# EAGLE board PCB (EAGLE 9.7.0)
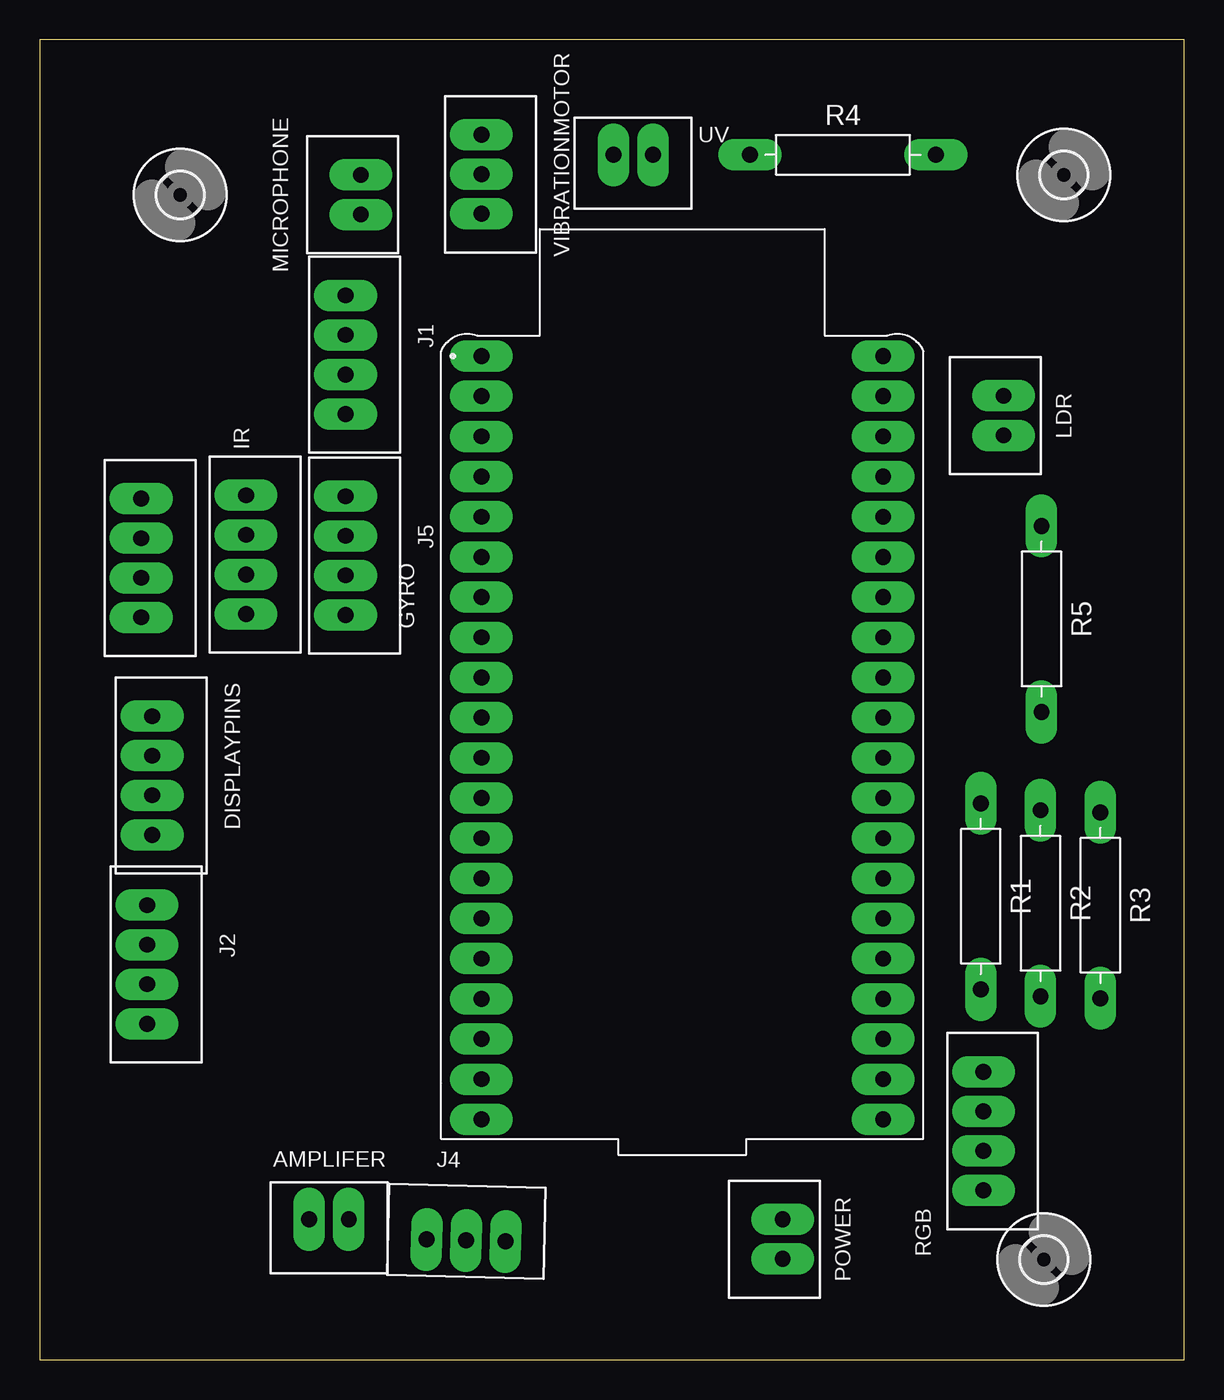
[diagram p0: board, top side]
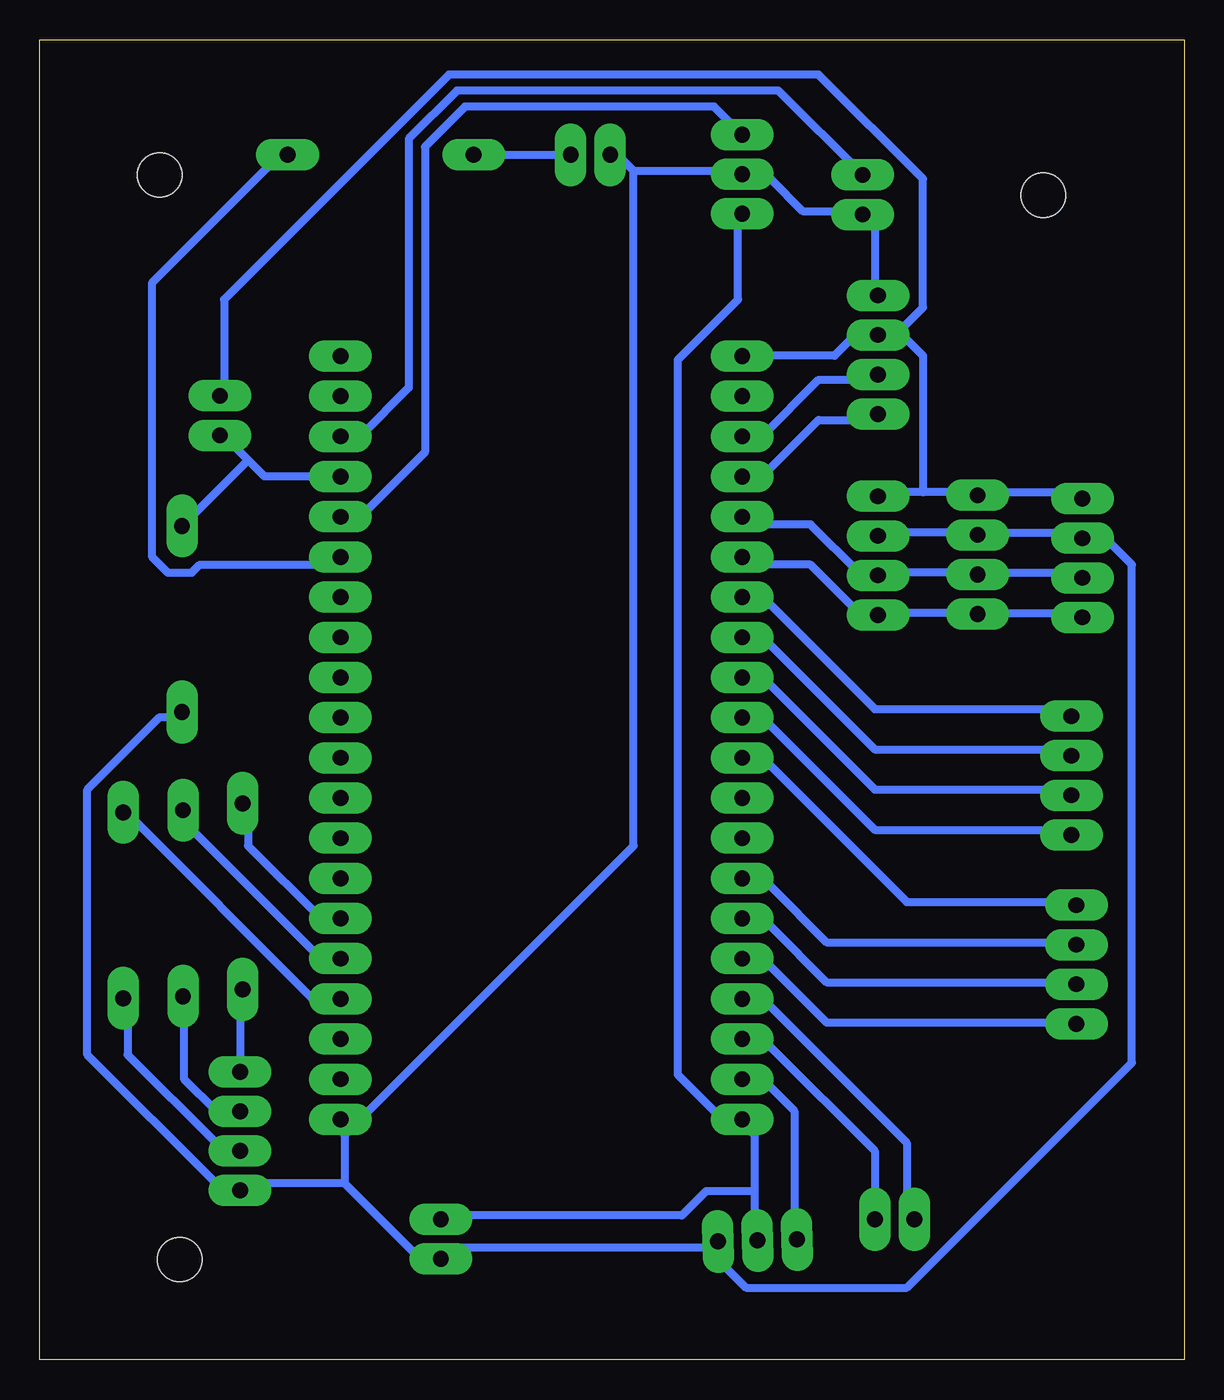
[diagram p1: board, bottom side, seen from below]

Size 72.37 x 83.49 mm. Coordinates in mm from the lower left corner, seen from the top.
Outline: 0,0 72.37,0 72.37,83.49 0,83.49 0,0
Copper layers (1*16): Top / Bottom
Stack-up Default Layer Stack: Top SilkScreen Epoxy Ink / Top SolderMask SR:Green 0.0254mm Dk 4.3 / Top Surface Finish Lead-Free 0.02mm / Top CuFoil:007 0.035mm / Dielectric-1 User Defined 1.5mm / Bottom CuFoil:007 0.035mm / Bottom Surface Finish Lead-Free 0.02mm / Bottom SolderMask SR:Green 0.0254mm Dk 4.3 / Bottom SilkScreen Epoxy Ink
Design rules: minimum copper width 20mil, minimum drill size 0.5mm, copper clearance wire_polygon to wire_polygon 20mil, copper clearance wire_polygon to pad_smd 20mil, copper clearance wire_polygon to via 20mil, copper clearance pad_smd to pad_smd 20mil, copper clearance pad_smd to via 20mil, copper clearance via to via 18mil, copper clearance smd to pad (same net) 6mil, copper clearance smd to via (same net) 6mil, copper clearance smd to smd (same net) 6mil, dimension clearance 40mil, via restrict clearance 0mil, restrict clearance 0mil, drill distance 6mil, keepout clearance 0mil

## Footprints (pad centres in the part's own frame; a part is rotated, then mirrored left to right if it is on the bottom)
B2B-XH-A = drill 1 pad 1.778 long: 1 0,0; 2 2.5,0
B4B-XH-A = drill 1 pad 1.778 long: 1 0,0; 2 2.5,0; 3 5,0; 4 7.5,0
2,8 = hole 2.8: 0,0
B3B-XH-A = drill 1 pad 1.778 long: 1 0,0; 2 2.5,0; 3 5,0
RESAD1176W63L850D250B = drill 1 pad 1.524 long: 1 -5.88,0; 2 5.88,0
MODULE_ESP32-DEVKITC-32E = drill 1 pad 1.778 long: J2_1 -12.7,22.835; J2_2 -12.7,20.295; J2_3 -12.7,17.755; J2_4 -12.7,15.215; J2_5 -12.7,12.675; J2_6 -12.7,10.135; J2_7 -12.7,7.595; J2_8 -12.7,5.055; J2_9 -12.7,2.515; J2_10 -12.7,-0.025; J2_11 -12.7,-2.565; J2_12 -12.7,-5.105; J2_13 -12.7,-7.645; J2_14 -12.7,-10.185; J2_15 -12.7,-12.725; J2_16 -12.7,-15.265; J2_17 -12.7,-17.805; J2_18 -12.7,-20.345; J2_19 -12.7,-22.885; J2_20 -12.7,-25.425; J3_1 12.7,22.835; J3_2 12.7,20.295; J3_3 12.7,17.755; J3_4 12.7,15.215; J3_5 12.7,12.675; J3_6 12.7,10.135; J3_7 12.7,7.595; J3_8 12.7,5.055; J3_9 12.7,2.515; J3_10 12.7,-0.025; J3_11 12.7,-2.565; J3_12 12.7,-5.105; J3_13 12.7,-7.645; J3_14 12.7,-10.185; J3_15 12.7,-12.725; J3_16 12.7,-15.265; J3_17 12.7,-17.805; J3_18 12.7,-20.345; J3_19 12.7,-22.885; J3_20 12.7,-25.425

## Placement (x,y rotation side)
AMPLIFER  B2B-XH-A  [B2B-XH-A]  17.06,8.89 0 top
DISPLAYPINS  B4B-XH-A  [B4B-XH-A]  7.12,40.71 270 top
GYRO  B4B-XH-A  [B4B-XH-A]  13.06,54.67 270 top
H1  MOUNT-HOLE2.8  [2,8]  64.77,74.93 0 top
H2  MOUNT-HOLE2.8  [2,8]  8.89,73.66 0 top
H3  MOUNT-HOLE2.8  [2,8]  63.5,6.35 0 top
IR  B4B-XH-A  [B4B-XH-A]  6.43,54.46 270 top
J1  B4B-XH-A  [B4B-XH-A]  19.35,67.31 270 top
J2  B4B-XH-A  [B4B-XH-A]  6.8,28.76 270 top
J4  B3B-XH-A  [B3B-XH-A]  24.47,7.62 358.6 top
J5  B4B-XH-A  [B4B-XH-A]  19.35,54.61 270 top
LDR  B2B-XH-A  [B2B-XH-A]  60.96,60.96 270 top
MICROPHONE  B2B-XH-A  [B2B-XH-A]  20.32,74.93 270 top
POWER  B2B-XH-A  [B2B-XH-A]  46.99,8.89 270 top
R1  [RESAD1176W63L850D250B]  59.52,29.31 270 top
R2  [RESAD1176W63L850D250B]  63.3,28.88 270 top
R3  [RESAD1176W63L850D250B]  67.08,28.75 270 top
R4  [RESAD1176W63L850D250B]  50.8,76.2 0 top
R5  [RESAD1176W63L850D250B]  63.36,46.85 270 top
RGB  B4B-XH-A  [B4B-XH-A]  59.69,18.22 270 top
U2  ESP32-DEVKITC-32E  [MODULE_ESP32-DEVKITC-32E]  40.64,40.64 0 top
UV  B2B-XH-A  [B2B-XH-A]  36.28,76.2 0 top
VIBRATIONMOTOR  B3B-XH-A  [B3B-XH-A]  27.94,77.47 270 top

## Library data of the parts
AMPLIFER LDR MICROPHONE POWER UV = Connector; CATEGORY: Header; DATASHEET: https://www.jst-mfg.com/product/pdf/eng/eXH.pdf?67404de0bbae1; DESCRIPTION: Connector Header Through Hole 2 position 0.098" (2.50mm); MANUFACTURER: JST Sales America Inc.; MPN: B2B-XH-A; OPERATING_TEMPERATURE: -25°C ~ 85°C; PACKAGE_SIZE: NA; PACKAGE_TYPE: THT; PART_STATUS: ACTIVE; PITCH: 0.098" (2.50mm); ROHS: COMPLIANT; SERIES: XH; SUBCATEGORY: Rectangular Connectors; TYPE: Header-Male Pin-Board to Cable/Wire-Through Hole
DISPLAYPINS GYRO IR J1 J2 J5 RGB = Connector; CATEGORY: Header; DATASHEET: https://www.jst-mfg.com/product/pdf/eng/eXH.pdf?67404de0bbae1; DESCRIPTION: Connector Header Through Hole 4 position 0.098" (2.50mm); MANUFACTURER: JST Sales America Inc.; MPN: B4B-XH-A; OPERATING_TEMPERATURE: -25°C ~ 85°C; PACKAGE_SIZE: NA; PACKAGE_TYPE: THT; PART_STATUS: ACTIVE; PITCH: 0.098" (2.50mm); ROHS: COMPLIANT; SERIES: XH; SUBCATEGORY: Rectangular Connectors; TYPE: Header-Male Pin-Board to Cable/Wire-Through Hole
H1-H3 = SEMET+1
J4 VIBRATIONMOTOR = Connector; CATEGORY: Header; DATASHEET: https://www.jst-mfg.com/product/pdf/eng/eXH.pdf?67404de0bbae1; DESCRIPTION: Connector Header Through Hole 3 position 0.098" (2.50mm); MANUFACTURER: JST Sales America Inc.; MPN: B3B-XH-A; OPERATING_TEMPERATURE: -25°C ~ 85°C; PACKAGE_SIZE: NA; PACKAGE_TYPE: THT; PART_STATUS: ACTIVE; PITCH: 0.098" (2.50mm); ROHS: COMPLIANT; SERIES: XH; SUBCATEGORY: Rectangular Connectors; TYPE: Header-Male Pin-Board to Cable/Wire-Through Hole
R1-R5 = SEMET+1; CATEGORY: Resistor; SUB-CATEGORY: Fixed
U2 = freenove esp32 s3; MANUFACTURER: Espressif Systems; PARTREV: 1.4; STANDARD: Manufacturer Recommendations

## Nets
40: U2.J3_7
N$1: U2.J3_5 VIBRATIONMOTOR.1
N$2: J2.2 U2.J2_14
N$3: DISPLAYPINS.1 U2.J2_7
N$4: DISPLAYPINS.2 U2.J2_8
N$5: DISPLAYPINS.3 U2.J2_9
N$6: DISPLAYPINS.4 U2.J2_10
N$7: J2.1 U2.J2_11
N$8: J1.3 U2.J2_3
N$9: J1.4 U2.J2_4
N$10: J4.1 U2.J2_19
N$11: J2.3 U2.J2_15
N$12: J2.4 U2.J2_16
N$13: AMPLIFER.2 U2.J2_18
N$14: AMPLIFER.1 U2.J2_17
N$15: R1.1 U2.J3_15
N$16: R2.1 U2.J3_16
N$17: R3.1 U2.J3_17
N$18: R1.2 RGB.1
N$19: R2.2 RGB.2
N$20: R3.2 RGB.3
N$21: J4.2 POWER.1 U2.J2_20 VIBRATIONMOTOR.3
N$22: R4.1 UV.2
N$24: LDR.2 R5.1 U2.J3_4
N$26: GYRO.3 IR.3 J5.3 U2.J2_5
N$27: MICROPHONE.1 U2.J3_3
N$28: GYRO.4 IR.4 J5.4 U2.J2_6
N$29: GYRO.1 IR.1 J1.2 J5.1 LDR.1 U2.J2_1
N$31: GYRO.2 IR.2 J1.1 J4.3 J5.2 MICROPHONE.2 POWER.2 R5.2 RGB.4 U2.J3_20 UV.1 VIBRATIONMOTOR.2
N$33: R4.2 U2.J3_6
TX: U2.J3_1

## Tracks (layer width: path | path; a pad name or v marks a point on that pad's centre or on a via)
N$1
  Bottom 0.508: VIBRATIONMOTOR.1 29.72,79.25 45.47,79.25 48.01,76.71 48.01,57.4 52.07,53.34 53.09,53.34 U2.J3_5
N$2
  Bottom 0.508: J2.2 6.86,26.42 22.61,26.42 26.16,29.97 27.69,29.97 U2.J2_14
N$3
  Bottom 0.508: DISPLAYPINS.1 7.37,41.15 19.56,41.15 26.16,47.75 27.69,47.75 U2.J2_7
N$4
  Bottom 0.508: DISPLAYPINS.2 7.37,38.61 19.56,38.61 26.16,45.21 27.69,45.21 U2.J2_8
N$5
  Bottom 0.508: DISPLAYPINS.3 7.37,36.07 19.56,36.07 26.16,42.67 27.69,42.67 U2.J2_9
N$6
  Bottom 0.508: DISPLAYPINS.4 7.37,33.53 19.56,33.53 26.16,40.13 27.69,40.13 U2.J2_10
N$7
  Bottom 0.508: J2.1 6.86,28.96 17.53,28.96 26.16,37.59 27.69,37.59 U2.J2_11
N$8
  Bottom 0.508: J1.3 19.56,61.98 23.11,61.98 26.67,58.42 27.69,58.42 U2.J2_3
N$9
  Bottom 0.508: J1.4 19.56,59.44 23.11,59.44 26.67,55.88 27.69,55.88 U2.J2_4
N$10
  Bottom 0.508: J4.1 24.64,7.62 24.64,15.75 26.16,17.27 27.69,17.27 U2.J2_19
N$11
  Bottom 0.508: J2.3 6.86,23.88 22.61,23.88 26.16,27.43 27.69,27.43 U2.J2_15
N$12
  Bottom 0.508: J2.4 6.86,21.34 22.61,21.34 26.16,24.89 27.69,24.89 U2.J2_16
N$13
  Bottom 0.508: AMPLIFER.2 19.56,9.14 19.56,13.21 26.16,19.81 27.69,19.81 U2.J2_18
N$14
  Bottom 0.508: AMPLIFER.1 17.53,9.14 17.53,13.72 26.16,22.35 27.69,22.35 U2.J2_17
N$15
  Bottom 0.508: U2.J3_15 53.59,27.94 54.61,27.94 59.18,32.51 59.18,35.05 R1.1
N$16
  Bottom 0.508: U2.J3_16 53.59,25.4 54.61,25.4 63.75,34.54 R2.1
N$17
  Bottom 0.508: U2.J3_17 53.59,22.86 55.12,22.86 66.8,34.54 R3.1
N$18
  Bottom 0.508: RGB.1 59.69,23.37 R1.2
N$19
  Bottom 0.508: RGB.2 59.69,15.75 61.21,15.75 63.25,17.78 63.25,22.86 R2.2
N$20
  Bottom 0.508: RGB.3 59.69,13.72 61.21,13.72 66.8,19.3 66.8,22.86 R3.2
N$21
  Bottom 0.508: 27.18,10.67 27.18,14.22 27.69,14.73 U2.J2_20 28.19,15.24 29.21,15.24 32,18.03 32,63.25 28.19,67.06 28.19,72.14 VIBRATIONMOTOR.3 | 27.18,10.67 27.18,7.62 J4.2 | 27.18,10.67 30.23,10.67 31.75,9.14 46.99,9.14 POWER.1
N$22
  Bottom 0.508: R4.1 UV.2
N$24
  Bottom 0.508: 59.18,56.9 60.71,58.42 LDR.2 | 59.18,56.9 58.17,55.88 53.59,55.88 U2.J3_4 | 59.18,56.9 63.25,52.83 R5.1
N$26
  Bottom 0.508: IR.3 6.86,49.78 12.95,49.78 GYRO.3 13.46,49.78 19.05,49.78 J5.3 19.56,49.78 20.57,49.78 23.62,52.83 27.69,52.83 U2.J2_5
N$27
  Bottom 0.508: MICROPHONE.1 25.65,80.26 45.97,80.26 49.02,77.22 49.02,61.47 52.07,58.42 53.09,58.42 U2.J3_3
N$28
  Bottom 0.508: IR.4 6.86,47.24 12.95,47.24 GYRO.4 13.46,47.24 19.05,47.24 J5.4 19.56,47.24 20.57,47.24 23.62,50.29 27.69,50.29 U2.J2_6
N$29
  Bottom 0.508: IR.1 6.86,54.86 12.95,54.86 GYRO.1 13.46,54.86 16.51,54.86 | 16.51,54.86 19.05,54.86 J5.1 | 18.03,65.02 16.51,66.55 16.51,74.68 23.11,81.28 46.48,81.28 60.71,67.06 60.71,60.96 LDR.1 | 18.03,65.02 19.05,65.02 J1.2 | U2.J2_1 27.69,63.5 22.1,63.5 21.08,64.52 19.56,64.52 J1.2 | 16.51,54.86 16.51,63.5 18.03,65.02 | 18.03,65.02 J1.2
N$31
  Bottom 0.508: J1.1 19.56,67.56 19.56,71.63 20.07,72.14 MICROPHONE.2 20.57,72.64 24.13,72.64 26.16,74.68 27.69,74.68 VIBRATIONMOTOR.2 28.19,75.18 34.8,75.18 | 34.8,75.18 35.81,76.2 UV.1 | J5.2 19.05,52.32 13.46,52.32 GYRO.2 12.95,52.32 6.86,52.32 IR.2 6.35,51.82 4.83,51.82 3.3,50.29 3.3,18.8 17.53,4.57 27.69,4.57 30.23,7.11 | 46.99,6.6 48.51,6.6 53.09,11.18 | 53.09,14.22 53.09,14.73 U2.J3_20 53.09,14.22 | 53.09,14.22 53.09,11.18 | 30.23,7.11 46.48,7.11 46.99,6.6 | 30.23,7.11 29.72,7.11 J4.3 30.23,7.11 | 46.99,6.6 POWER.2 | 53.09,11.18 59.69,11.18 | 59.69,11.18 61.21,11.18 69.34,19.3 69.34,36.07 64.77,40.64 63.75,40.64 R5.2 | 59.69,11.18 RGB.4 | 34.8,75.18 34.8,32.51 53.09,14.22
N$33
  Bottom 0.508: U2.J3_6 53.59,50.29 62.23,50.29 62.74,49.78 64.26,49.78 65.28,50.8 65.28,68.07 57.15,76.2 R4.2